# EAGLE board minimal (EAGLE 6.6.0)
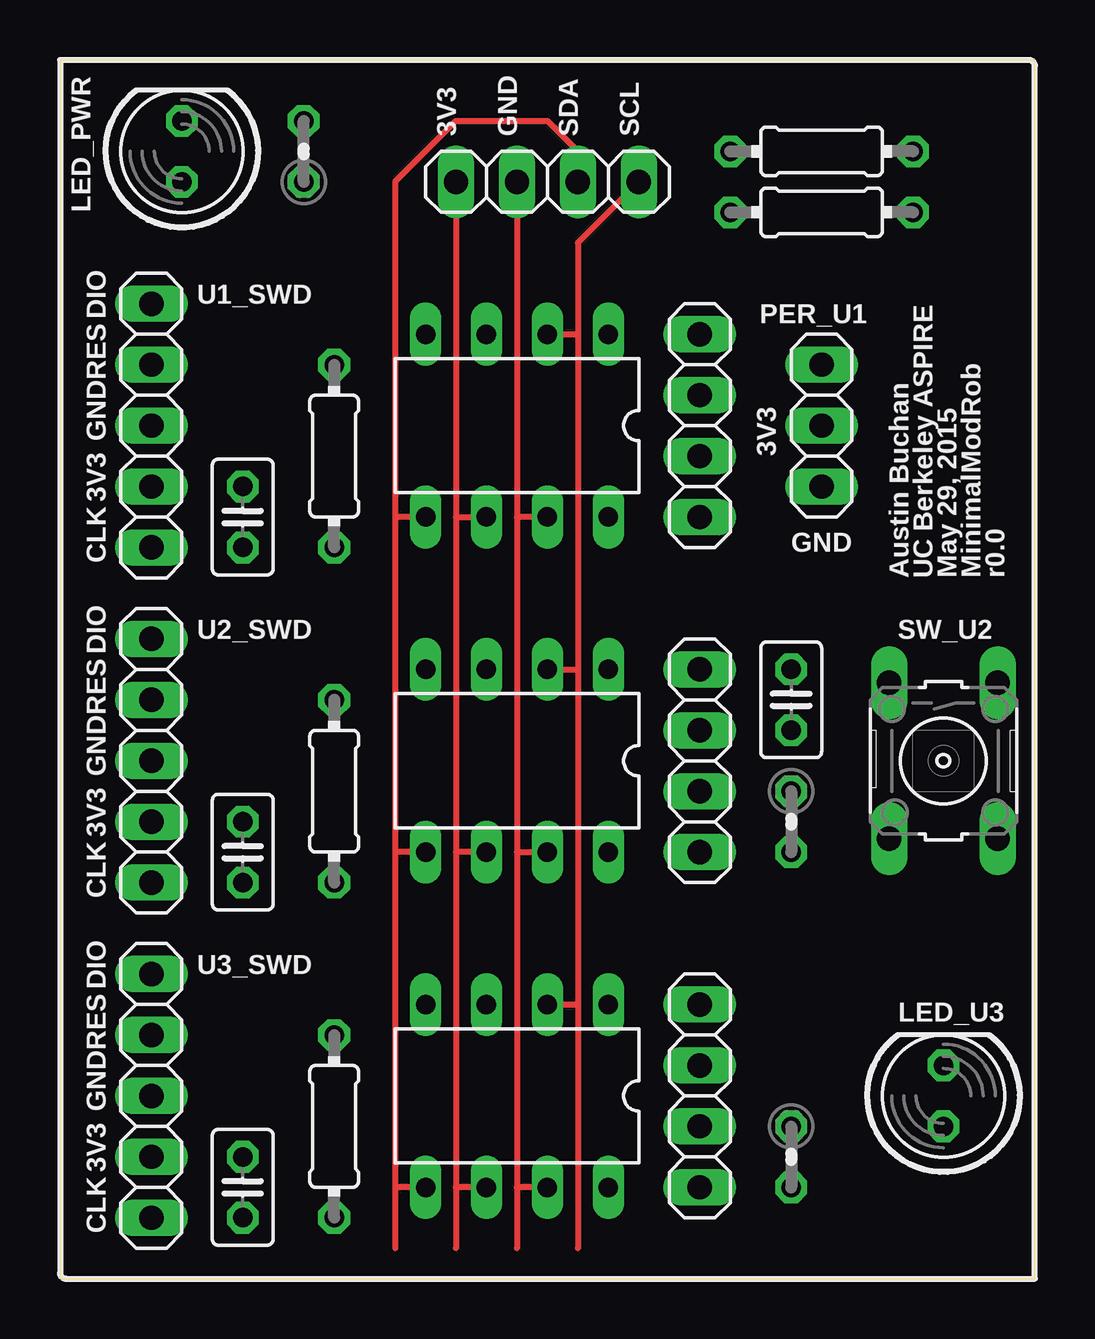
[diagram p0: board, top side]
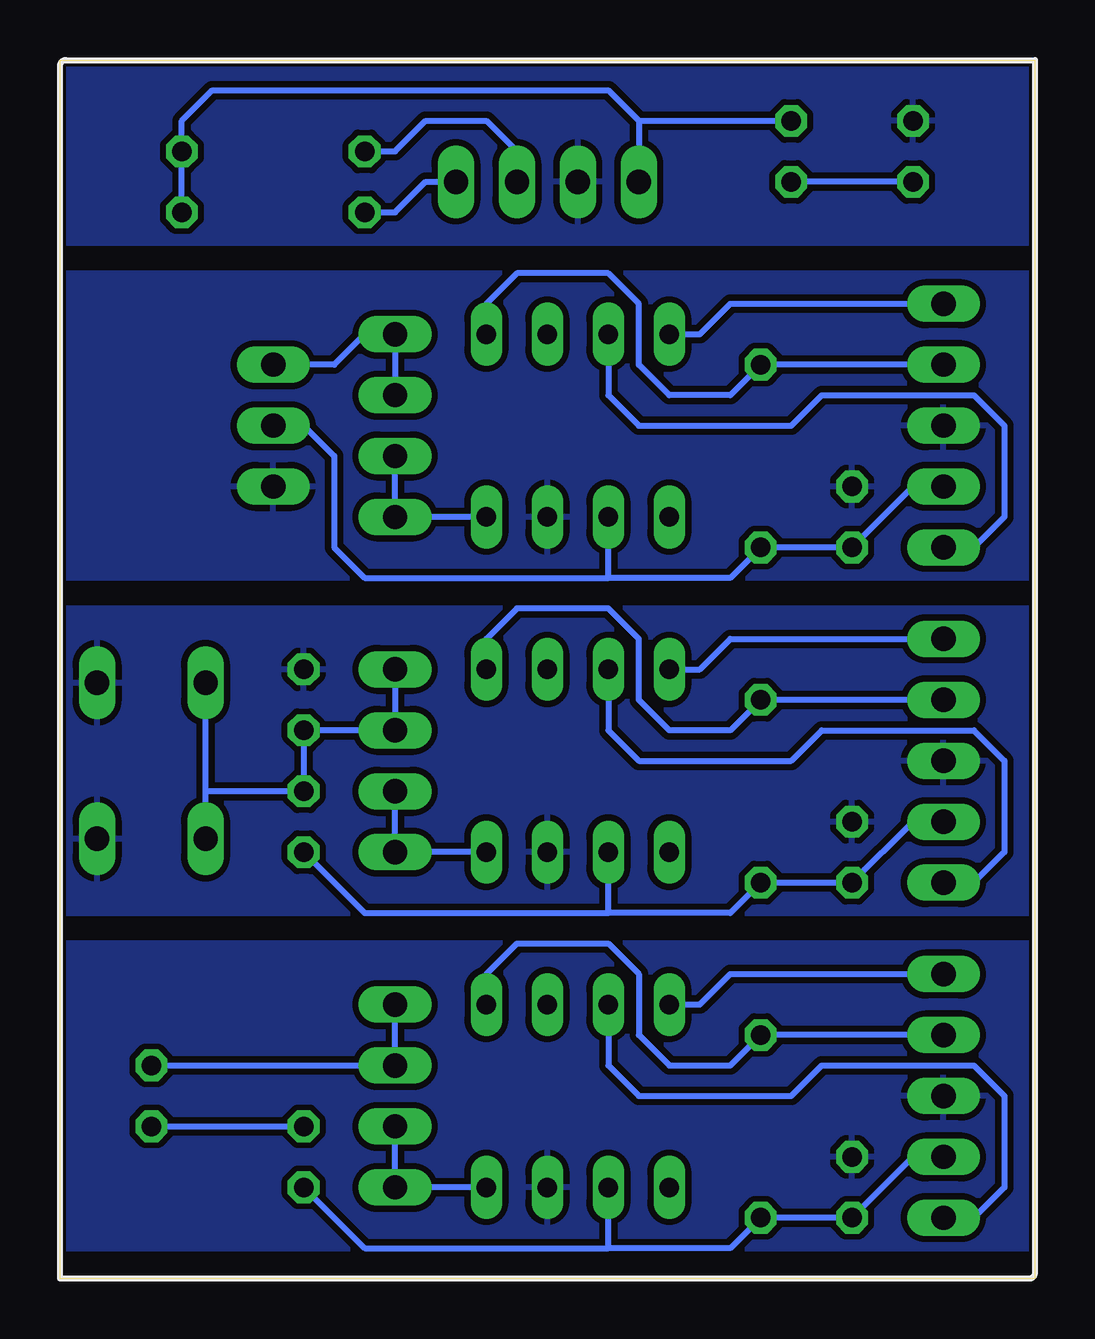
[diagram p1: board, bottom side, seen from below]

Size 40.64 x 50.8 mm. Coordinates in mm from the lower left corner, seen from the top.
Outline: 0,0 40.64,0 40.64,50.8 0,50.8 0,0
Copper layers (1*16): Top 0.035mm / dielectric 1.5mm / Bottom 0.035mm
Design rules "default *": minimum track width 10mil, minimum drill 24mil, track to track 10mil, track to pad 10mil, pad to pad 10mil, via to via 10mil, smd to smd 10mil, copper to edge 10mil, drill to drill 10mil, minimum pad ring 10mil, minimum via ring 8mil, stop-mask expansion 4mil, vias tented up to drill 0mil, thermal gap 10mil

## Footprints (pad centres in the part's own frame; a part is rotated, then mirrored left to right if it is on the bottom)
C025-025X050 = drill 0.813 octagon: 1 -1.27,0; 2 1.27,0
1X02 = drill 1.016 long: 1 -1.27,0; 2 1.27,0
LED5MM = drill 0.813 octagon: A -1.27,0; K 1.27,0
1X03 = drill 1.016 long: 1 -2.54,0; 2 0,0; 3 2.54,0
0204/7 = drill 0.813 octagon: 1 -3.81,0; 2 3.81,0
0204V = drill 0.813 octagon: 1 -1.27,0; 2 1.27,0
B3F-10XX = drill 1.016 long: 1 -3.251,2.261; 2 3.251,2.261; 3 -3.251,-2.261; 4 3.251,-2.261
DIL08 = drill 0.813 long: 1 -3.81,-3.81; 2 -1.27,-3.81; 3 1.27,-3.81; 4 3.81,-3.81; 5 3.81,3.81; 6 1.27,3.81; 7 -1.27,3.81; 8 -3.81,3.81
1X04 = drill 1.016 long: 1 -3.81,0; 2 -1.27,0; 3 1.27,0; 4 3.81,0
1X05 = drill 1.016 long: 1 -5.08,0; 2 -2.54,0; 3 0,0; 4 2.54,0; 5 5.08,0

## Placement (x,y rotation side)
C1  100nF  [C025-025X050]  7.62,31.75 90 top
C2  100nF  [C025-025X050]  7.62,17.78 90 top
C3  100nF  [C025-025X050]  7.62,3.81 90 top
C4  100nF  [C025-025X050]  30.48,24.13 90 top
I2C  [1X02]  22.86,45.72 180 top
LED_PWR  [LED5MM]  5.08,46.99 90 top
LED_U3  [LED5MM]  36.83,7.62 90 top
PER_U1  [1X03]  31.75,35.56 90 top
PWR  [1X02]  17.78,45.72 0 top
R1  4k7  [0204/7]  31.75,44.45 0 top
R2  4k7  [0204/7]  31.75,46.99 0 top
R3  10k  [0204V]  30.48,19.05 270 top
R4  1k  [0204V]  30.48,5.08 270 top
R5  1k  [0204V]  10.16,46.99 90 top
R6  10k  [0204/7]  11.43,34.29 270 top
R7  10k  [0204/7]  11.43,20.32 270 top
R8  10k  [0204/7]  11.43,6.35 270 top
SW_U2  [B3F-10XX]  36.83,21.59 270 top
U1  LPC810M021FN8FP-DIL08  [DIL08]  19.05,35.56 180 top
U1_IO  [1X04]  26.67,35.56 90 top
U1_SWD  [1X05]  3.81,35.56 270 top
U2  LPC810M021FN8FP-DIL08  [DIL08]  19.05,21.59 180 top
U2_IO  [1X04]  26.67,21.59 90 top
U2_SWD  [1X05]  3.81,21.59 270 top
U3  LPC810M021FN8FP-DIL08  [DIL08]  19.05,7.62 180 top
U3_IO  [1X04]  26.67,7.62 90 top
U3_SWD  [1X05]  3.81,7.62 270 top
U$1  INFO  [INFO]  39.37,29.21 90 top

## Library data of the parts
C1-C4 R1-R8 = rcl
I2C PER_U1 PWR U1_IO U1_SWD U2_IO U2_SWD U3_IO U3_SWD = pinhead
LED_PWR LED_U3 = led
SW_U2 = switch-omron; MPN: B3F-1000; OC_FARNELL: 176432; OC_NEWARK: 36M3542
U1-U3 = modular_robotics
U$1 = modular_robotics; AUTHOR: Austin Buchan; DATE: May 29, 2015; DESIGN: MinimalModRob; ORGANIZATION: UC Berkeley ASPIRE; REVISION: r0.0

## Nets
+3V3: C1.1 C2.1 C3.1 PER_U1.2 PWR.1 R1.2 R2.2 R3.2 R4.2 R5.2 R6.2 R7.2 R8.2 U1.6 U1_SWD.4 U2.6 U2_SWD.4 U3.6 U3_SWD.4
GND: C1.2 C2.2 C3.2 C4.2 LED_PWR.K PER_U1.1 PWR.2 SW_U2.1 SW_U2.2 U1.7 U1_SWD.3 U2.7 U2_SWD.3 U3.7 U3_SWD.3
I2C_SCL: I2C.1 R1.1 U1.2 U2.2 U3.2
I2C_SDA: I2C.2 R2.1 U1.5 U2.5 U3.5
N$1: LED_PWR.A R5.1
N$2: C4.1 R3.1 SW_U2.3 SW_U2.4 U2_IO.3 U2_IO.4
N$3: PER_U1.3 U1_IO.3 U1_IO.4
N$4: LED_U3.A R4.1
N$5: LED_U3.K U3_IO.3 U3_IO.4
U1_IO: U1.8 U1_IO.1 U1_IO.2
U1_RESET: R6.1 U1.1 U1_SWD.2
U1_SWCLK: U1.3 U1_SWD.5
U1_SWDIO: U1.4 U1_SWD.1
U2_IO: U2.8 U2_IO.1 U2_IO.2
U2_RESET: R7.1 U2.1 U2_SWD.2
U2_SWCLK: U2.3 U2_SWD.5
U2_SWDIO: U2.4 U2_SWD.1
U3_IO: U3.8 U3_IO.1 U3_IO.2
U3_RESET: R8.1 U3.1 U3_SWD.2
U3_SWCLK: U3.3 U3_SWD.5
U3_SWDIO: U3.4 U3_SWD.1

## Tracks (layer width: path | path; a pad name or v marks a point on that pad's centre or on a via)
+3V3
  Top 0.254: PWR.1 16.51,31.75 | 16.51,31.75 16.51,17.78 | 16.51,17.78 16.51,3.81 | 16.51,3.81 16.51,1.27 | U3.6 16.51,3.81 | U2.6 16.51,17.78 | 16.51,31.75 U1.6
  Bottom 0.254: 16.51,48.26 17.78,49.53 34.29,49.53 35.56,48.26 R2.2 R1.2 | 16.51,48.26 PWR.1 | U1_SWD.4 5.08,33.02 C1.1 R6.2 12.7,29.21 17.78,29.21 | 16.51,48.26 R5.2 | PER_U1.2 30.48,35.56 29.21,34.29 29.21,30.48 27.94,29.21 17.78,29.21 | 17.78,29.21 U1.6 | U2_SWD.4 5.08,19.05 C2.1 R7.2 12.7,15.24 17.78,15.24 | R3.2 27.94,15.24 17.78,15.24 | R4.2 27.94,1.27 17.78,1.27 | U3_SWD.4 5.08,5.08 C3.1 R8.2 12.7,1.27 17.78,1.27 | 17.78,1.27 U3.6 | 17.78,15.24 U2.6
GND
  Top 0.254: PWR.2 19.05,31.75 | 19.05,31.75 19.05,17.78 | 19.05,17.78 19.05,3.81 | 19.05,3.81 19.05,1.27 | U1.7 19.05,31.75 | U3.7 19.05,3.81 | 19.05,17.78 U2.7
  pour Bottom (isolate 0.254): 0,29.21 40.64,29.21 40.64,41.91 0,41.91
  pour Bottom: 0,50.8 40.64,50.8 40.64,43.18 0,43.18
  pour Bottom (isolate 0.254): 0,27.94 40.64,27.94 40.64,15.24 0,15.24
  pour Bottom (isolate 0.254): 0,13.97 40.64,13.97 40.64,1.27 0,1.27
I2C_SCL
  Top 0.254: I2C.1 21.59,43.18 21.59,39.37 | 21.59,39.37 21.59,25.4 | 21.59,25.4 21.59,11.43 | 21.59,11.43 21.59,1.27 | U3.2 21.59,11.43 | U2.2 21.59,25.4 | U1.2 21.59,39.37
  Bottom 0.254: R1.1 26.67,44.45 25.4,45.72 I2C.1
I2C_SDA
  Top 0.254: 13.97,31.75 13.97,45.72 16.51,48.26 20.32,48.26 21.59,46.99 I2C.2 | 13.97,31.75 13.97,17.78 | 13.97,17.78 13.97,3.81 | 13.97,3.81 13.97,1.27 | U2.5 13.97,17.78 | U1.5 13.97,31.75 | U3.5 13.97,3.81
  Bottom 0.254: R2.1 26.67,46.99 25.4,48.26 22.86,48.26 21.59,46.99 I2C.2
N$1
  Bottom 0.254: LED_PWR.A R5.1
N$2
  Bottom 0.254: U2_IO.4 U2_IO.3 C4.1 R3.1 34.57,20.32 | SW_U2.4 34.57,20.32 | 34.57,20.32 SW_U2.3
N$3
  Bottom 0.254: U1_IO.3 U1_IO.4 27.94,39.37 29.21,38.1 PER_U1.3
N$4
  Bottom 0.254: LED_U3.A R4.1
N$5
  Bottom 0.254: U3_IO.4 U3_IO.3 LED_U3.K
U1_IO
  Bottom 0.254: U1.8 U1_IO.1 U1_IO.2
U1_RESET
  Bottom 0.254: U1_SWD.2 R6.1 12.7,36.83 15.24,36.83 16.51,38.1 16.51,40.64 17.78,41.91 21.59,41.91 22.86,40.64 U1.1
U1_SWCLK
  Bottom 0.254: U1.3 17.78,36.83 16.51,35.56 10.16,35.56 8.89,36.83 2.54,36.83 1.27,35.56 1.27,31.75 2.54,30.48 U1_SWD.5
U1_SWDIO
  Bottom 0.254: U1.4 13.97,39.37 12.7,40.64 U1_SWD.1
U2_IO
  Bottom 0.254: U2.8 U2_IO.1 U2_IO.2
U2_RESET
  Bottom 0.254: U2_SWD.2 R7.1 12.7,22.86 15.24,22.86 16.51,24.13 16.51,26.67 17.78,27.94 21.59,27.94 22.86,26.67 U2.1
U2_SWCLK
  Bottom 0.254: U2.3 17.78,22.86 16.51,21.59 10.16,21.59 8.89,22.86 2.54,22.86 1.27,21.59 1.27,17.78 2.54,16.51 U2_SWD.5
U2_SWDIO
  Bottom 0.254: U2.4 13.97,25.4 12.7,26.67 U2_SWD.1
U3_IO
  Bottom 0.254: U3.8 U3_IO.1 U3_IO.2
U3_RESET
  Bottom 0.254: U3_SWD.2 R8.1 12.7,8.89 15.24,8.89 16.51,10.16 16.51,12.7 17.78,13.97 21.59,13.97 22.86,12.7 U3.1
U3_SWCLK
  Bottom 0.254: U3.3 17.78,8.89 16.51,7.62 10.16,7.62 8.89,8.89 2.54,8.89 1.27,7.62 1.27,3.81 2.54,2.54 U3_SWD.5
U3_SWDIO
  Bottom 0.254: U3.4 13.97,11.43 12.7,12.7 U3_SWD.1

## Text on the board
tPlace: 3V3 | GND | SDA | SCL | DIO | RES | GND | 3V3 | 3V3 | GND | CLK | DIO | RES | GND | 3V3 | CLK | DIO | RES | GND | 3V3 | CLK